# Altium PCB Control_2023-10-06.pcbdoc
Units mil, origin at the board's own origin, x right, y up, seen from the top; angles counter-clockwise.
Board outline 3765.9 x 2585.07 mil, 2 copper layers (Top Layer, Bottom Layer); 18 components, 23 nets, 57 pads, 2 vias.
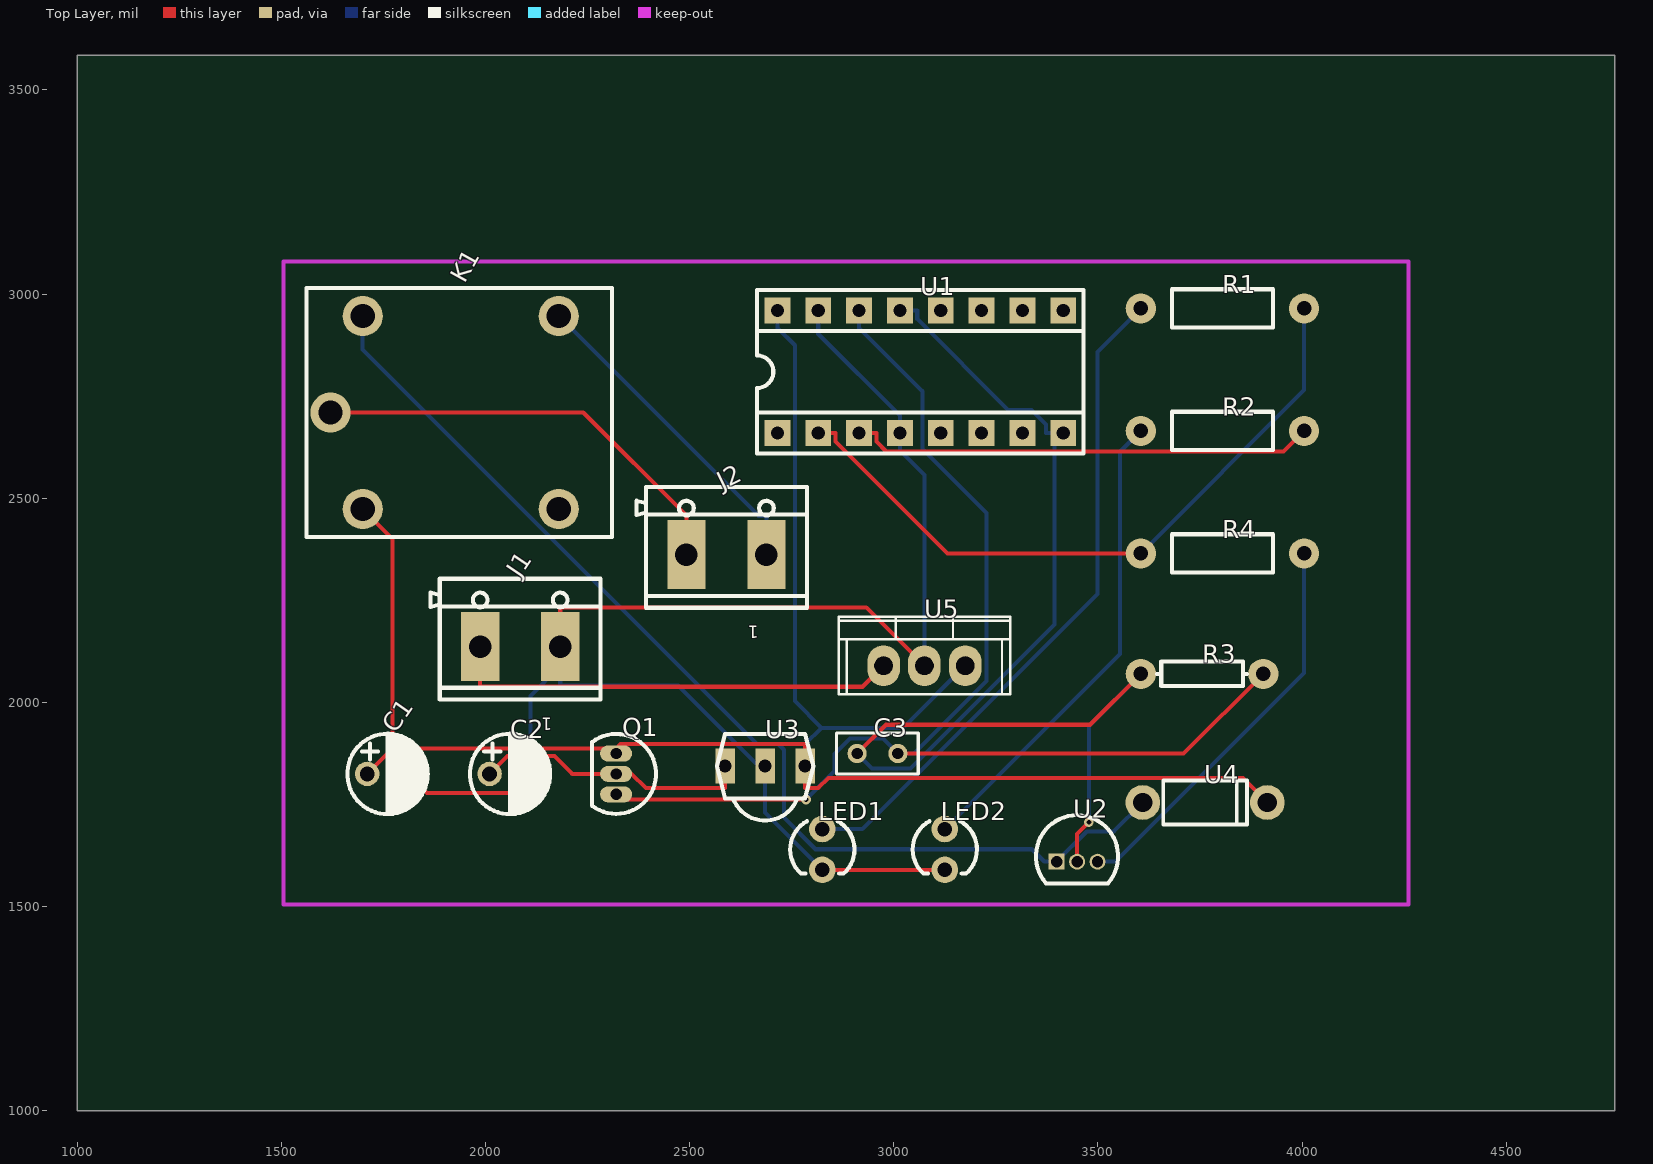
[diagram p0: Top Layer view]
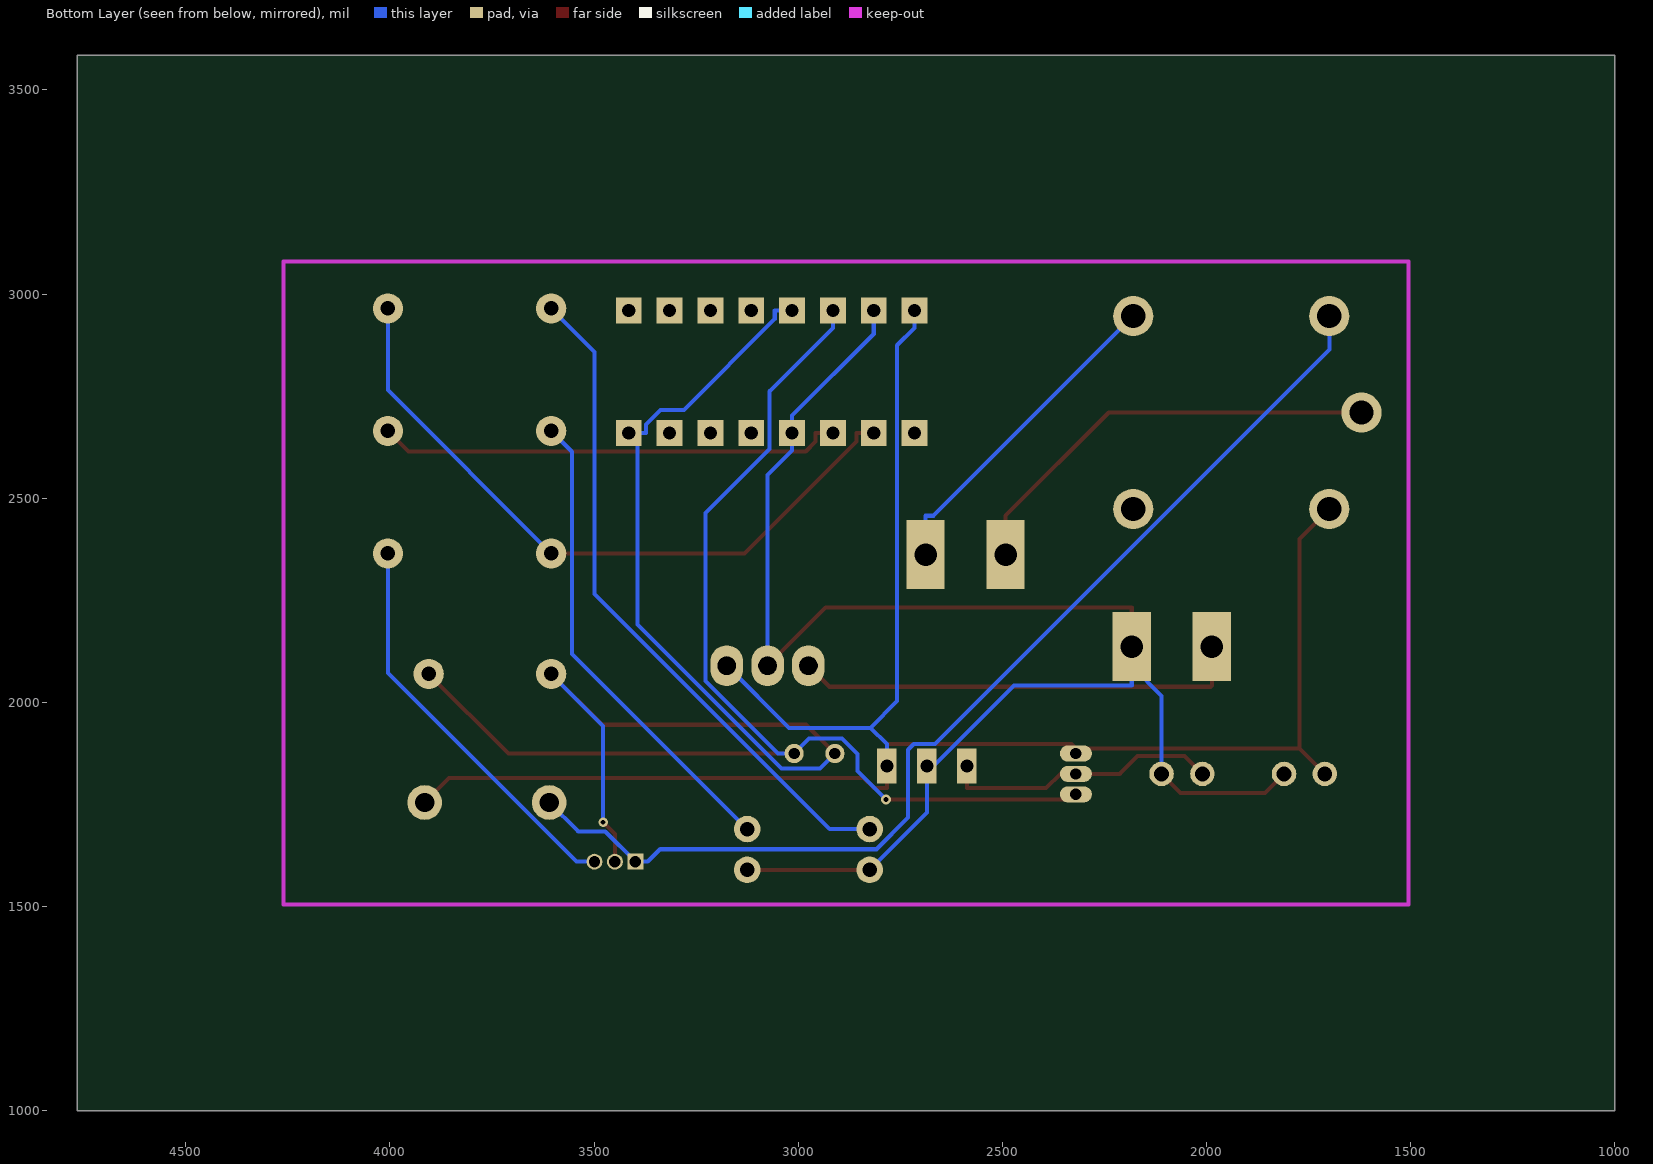
[diagram p1: Bottom Layer view, seen from below]

## Layer stack, top to bottom
Top Layer: signal copper (thickness not stored)
Dielectric: dielectric 12.6, FR-4, Dk 4.8
Bottom Layer: signal copper (thickness not stored)

## Board outline
4765.9,1000 1000,1000 1000,3585.07 4765.9,3585.07

## Components (designator, comment, footprint, x,y, rotation, side; value= is the part's Value field where it differs from the comment)
C1 "100uF" CAP-5*11 1760,1824.8 r0 top
C2 "100uF" CAP-5*11 2060,1824.8 r0 top
C3 "0.1uf" RAD-0.1 2960,1874.8 r0 top
J1 "CON_TERMINAL_BLOCK_02-5MM" TERMINAL_BLOCK_2P_5 2085,2154.8 r0 top
J2 "CON_TERMINAL_BLOCK_02-5MM" TERMINAL_BLOCK_2P_5 2590,2379.8 r0 top
K1 "RelayHT3F-12VDC-SHG" RELAY-TH_5PIN_HT3F-12VDC-SHG 1900,2709.8 r0 top
LED1 "LED-3MM" LED-3MM/2.54 2825,1639.8 r0 top
LED2 "LED-3MM" LED-3MM/2.54 3125,1639.8 r0 top
Q1 "BC557" TO-92(TO-92-3) 2325,1869.8 r0 top
R1 "330Ω" AXIAL-0.4 3805,2964.8 r0 top
R2 "330Ω" AXIAL-0.4 3805,2664.8 r0 top
R3 "220k" AXIAL-0.3 3605,2069.8 r0 top
R4 "1KΩ" AXIAL-0.4 3805,2364.8 r0 top
U1 "CD4017BE" DIP-16 3065,2809.8 r0 top
U2 "BC547" BC547 3440,1639.8 r0 top
U3 "TSOP1838" TSOP18XX 2685,1844.8 r0 top
U4 "1N4007 DIODE" DO-41 3610,1754.8 r0 top
U5 "7805" TO-220 3075,2089.8 r0 top

## Footprints (in the part's own frame and the unit in brackets; to place one, negate y for a bottom-side part, rotate by r counter-clockwise, add the part's x,y. Pads: shape width x height; smd on the part's side, far side on the other; paste and mask are expansions set on the pad)
AXIAL-0.3 [mil]
  round 74 hole 35.4 paste+0 mask+2: 1(0,0) 2(300,0)
  silkscreen extent 40,-30 260,30
AXIAL-0.4 [mil]
  round 74 hole 35.4 paste+0 mask+2: 1(-200,0) 2(200,0)
  silkscreen extent -124,-47 124,47
BC547 [mil]
  rect 39x39 hole 28 paste+0 mask+2: 1(-41,-30)
  round 39 hole 28 paste+0 mask+2: 2(9,-30) 3(59,-30)
  silkscreen extent -92,-83 109,84
CAP-5*11 [mil]
  round 60 hole 36 paste+0 mask+2: 1(-50,0) 2(50,0)
  silkscreen extent -98,-98 98,98
DIP-16 [mil]
  rect 63x63 hole 32 paste+0 mask+2: 1(-350,-150) 2(-250,-150) 3(-150,-150) 4(-50,-150) 5(50,-150) 6(150,-150) 7(250,-150) 8(350,-150) 9(350,150) 10(250,150) 11(150,150) 12(50,150) 13(-50,150) 14(-150,150) 15(-250,150) 16(-350,150)
  silkscreen extent -400,-200 400,200
DO-41 [mil]
  round 85 hole 47.24 paste+0 mask+2: 1(0,0) 2(305,0)
  silkscreen extent 50,-54 255,54
LED-3MM/2.54 [mil]
  round 65 hole 35.43 paste+0 mask+2: 1(0,50) 2(0,-50)
  silkscreen extent -79,-59 79,69
RAD-0.1 [mil]
  round 47 hole 28 paste+0 mask+2: 1(-50,0) 2(50,0)
  silkscreen extent -100,-50 100,50
RELAY-TH_5PIN_HT3F-12VDC-SHG [mm]
  round 2.5 hole 1.5 paste+0 mask+0.102: 1(-7.1,0) 2(-5.101,-6) 3(7.099,-6) 4(7.099,6) 5(-5.101,6)
  silkscreen extent -8.6,-7.75 10.4,7.75
TERMINAL_BLOCK_2P_5 [mil]
  rect 93.7x168.7 hole 55.2 paste+0 mask+2: 1(98,-18) 2(-98,-18)
  silkscreen extent -220,-148 197,148
TO-92(TO-92-3) [mil]
  oval 78.74x39.37 hole 27.56 paste+0 mask+2: 1(-5,5) 2(-5,-45) 3(-5,-95)
  silkscreen extent -64,-143 93,53
TO-220 [mil]
  oval 80x100 hole 45 slot 45.2 at 90 deg paste+0 mask+4: 1(-100,0) 2(0,0) 3(100,0)
  silkscreen extent -210,-70 210,120
TSOP18XX [mil]
  rect 47.7x85.9 hole 32 paste+0 mask+2: GND(0,-1.05) OUT(-98,-1.05) VCC(98,-1.05)
  silkscreen extent -118,-134 118,78

## Via types
v1: diameter 24, hole 12, Top Layer to Bottom Layer, tented both sides, 2 vias

## Nets (pads, with @x,y where several pads share a name; then routed paths per layer and width w, separated by ;. In a path a pad name is that pad's centre, name@x,y a point inside that pad or via, vN(x,y) a via of type N, cw(c..) or ccw(c..) an arc to the next point about the centre after c; other vN are vias at no path point)
C2_1: C2.1 Q1.2 U3.OUT | length 681.4
  Top Layer w10: C2.1 2053.44,1868.24 2169.06,1868.24 2212.5,1824.8 Q1.2 2357.9,1824.8 2392.91,1789.79 2587,1789.79 U3.OUT
GND: C3.1 R3.1 U1.8 U1.13 U2.2 | length 2963
  Top Layer w10: C3.1 2980.43,1945.23 3480.43,1945.23 R3.1 ; U2.2 3449,1677.77 v1(3477.73,1706.5)
  Bottom Layer w10: C3.1 2946.3,1838.5 3040.99,1838.5 3393.75,2191.26 U1.8@3393.75,2659.8 ; U1.13 3057.51,2959.8 3057.51,2938.54 3279.5,2716.55 3336.99,2716.55 3372.49,2681.05 3372.49,2659.8 U1.8@3393.75,2659.8 ; U1.8 U1.8@3393.75,2659.8 ; v1(3477.73,1706.5) 3477.73,1942.53 R3.1
J2_1: J2.1 K1.4 | length 806.3
  Bottom Layer w10: K1.4 2668.37,2457.16 2688,2457.16 J2.1
J2_2: J2.2 K1.1 | length 1071.5
  Top Layer w10: K1.1 2239.36,2709.8 2492,2457.16 J2.2
K1_3: K1.3
R1_1: LED1.1 R1.1 | length 1655.4
  Bottom Layer w10: LED1.1 2922.81,1689.8 3498.8,2265.79 3498.8,2858.6 R1.1
R2_1: LED2.1 R2.1 | length 1173.8
  Bottom Layer w10: LED2.1 3554.09,2118.89 3554.09,2613.89 R2.1
R4_2: R4.2 U2.3 | length 990.2
  Bottom Layer w10: U2.3 3542.77,1609.8 4005,2072.03 R4.2
U1_1: U1.1
U1_2: R1.2 R4.1 U1.2 | length 1690.3
  Top Layer w10: U1.2 2857.51,2659.8 2857.51,2638.54 3131.25,2364.8 R4.1
  Bottom Layer w10: R4.1 4005,2764.8 R1.2
U1_3: R2.2 U1.3 | length 1142.1
  Top Layer w10: U1.3 2957.51,2659.8 2957.51,2638.54 2981.56,2614.49 3954.69,2614.49 R2.2
U1_4: C1.2 C2.2 J1.1 LED1.2 LED2.2 U1.4 U1.15 U3.GND U5.2 | length 3956.3
  Top Layer w10: C1.2 1856.55,1778.25 2063.45,1778.25 C2.2 ; J1.1 2183,2232.16 2932.64,2232.16 U5.2 ; LED1.2 LED2.2
  Bottom Layer w10: C2.2 2110,2016.12 J1.1@2183,2089.12 ; J1.1 J1.1@2183,2089.12 ; U3.GND U3.GND@2685,1826.65 ; U1.15 2815,2902.31 3015,2702.31 U1.4 3015,2617.29 3075,2557.29 U5.2 ; LED1.2 2685,1729.8 U3.GND@2685,1826.65 ; J1.1@2183,2089.12 2183,2041.44 2471.74,2041.44 2685,1828.18 U3.GND@2685,1826.65
U1_5: U1.5
U1_6: U1.6
U1_7: U1.7
U1_9: U1.9
U1_10: U1.10
U1_11: U1.11
U1_12: U1.12
U1_14: C3.2 Q1.3 R3.2 U1.14 | length 3100.1
  Top Layer w10: Q1.3 2332.98,1761.82 v1(2784.82,1761.82) ; C3.2 3710,1874.8 R3.2
  Bottom Layer w10: v1(2784.82,1761.82) 2854.45,1831.45 2854.45,1873.18 2892.87,1911.6 2973.2,1911.6 C3.2 3049.58,1874.8 3226.9,2052.12 3226.9,2463.55 3070.29,2620.16 3070.29,2762 2915,2917.29 U1.14
U1_16: C1.1 K1.2 Q1.1 U1.16 U3.VCC U4.2 U5.3 | length 4599.6
  Top Layer w10: K1.2 1772.22,2400.56 1772.22,1887.02 ; C1.1 1772.22,1887.02 ; Q1.1 Q1.1@2320,1887.02 ; U4.2 3855.29,1814.51 2839.66,1814.51 2814.94,1789.79 2783,1789.79 U3.VCC 2783,1846.01 2783,1897.71 2782.95,1897.76 2330.74,1897.76 Q1.1@2320,1887.02 ; 1772.22,1887.02 Q1.1@2320,1887.02
  Bottom Layer w10: U1.16 2715,2917.29 2757.56,2874.73 2757.56,2002.95 2822.9,1937.61 ; U3.VCC 2783,1897.71 2822.9,1937.61 ; U5.3 3022.81,1937.61 2822.9,1937.61
U2_1: K1.5 U2.1 U4.1 | length 2669.8
  Bottom Layer w10: K1.5 1699.2,2864.02 2665.34,1897.88 2717,1897.88 2730.93,1883.95 2730.93,1717.67 2808.29,1640.31 3337.98,1640.31 3368.49,1609.8 U2.1 3472.65,1683.45 3538.65,1683.45 U4.1
U5_1: J1.2 U5.1 | length 1106
  Top Layer w10: J1.2 1987,2041.44 1990.15,2038.29 2923.49,2038.29 U5.1

## Text inside footprints (layer, text, board x,y; h text height)
J1: Top Overlay "1" at 2164,1962.8 h30 r180
J2: Top Overlay "1" at 2669,2187.8 h30 r180